# EAGLE board raspberry (EAGLE 9.6.2)
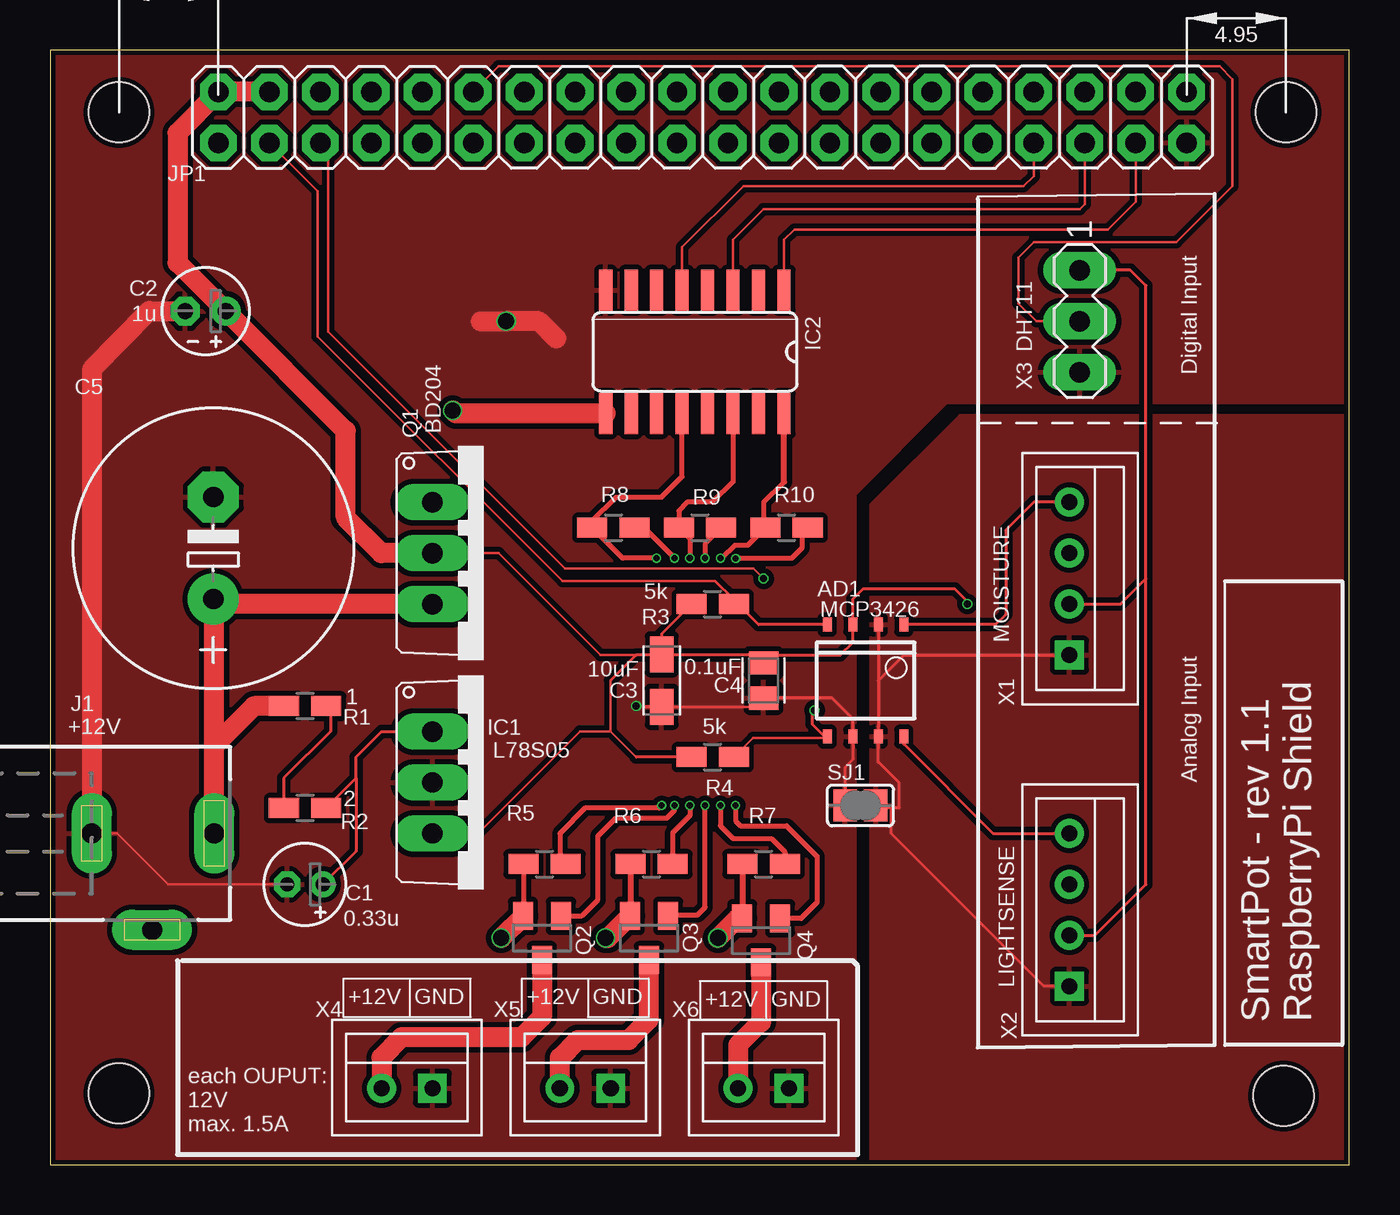
[diagram p0: board, top side]
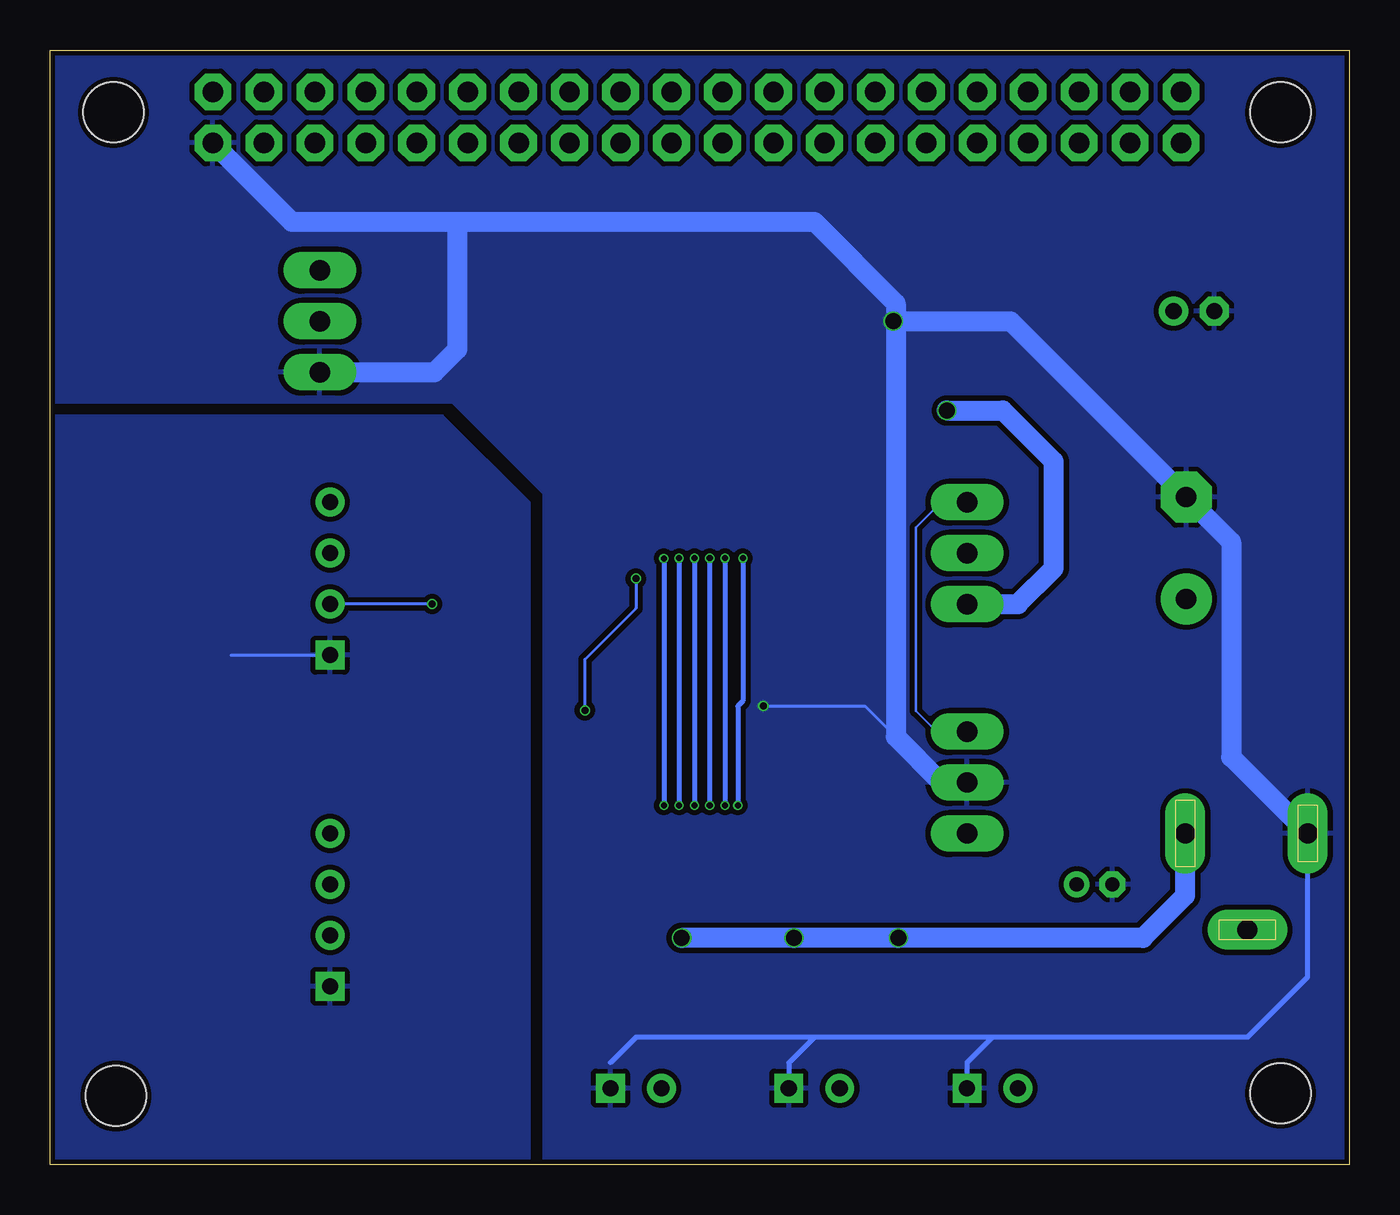
[diagram p1: board, bottom side, seen from below]

Size 64.75 x 55.55 mm. Coordinates in mm from the lower left corner, seen from the top.
Outline: 0,0 64.75,0 64.75,55.55 0,55.55 0,0
Copper layers (1*16): Top 0.035mm / dielectric 1.6mm / Bottom 0.035mm
Design rules "jlcpcb-2layers": minimum track width 5mil, minimum drill 0.3mm, track to track 5mil, track to pad 5mil, pad to pad 5mil, via to via 5mil, smd to smd 5mil, copper to edge 0.2mm, drill to drill 6mil, minimum pad ring 10mil, minimum via ring 3mil, stop-mask expansion 4mil, vias tented up to drill 0mil, thermal gap 10mil
Holes 3 mm at 3.43,52.45 61.59,52.45 61.47,3.43 3.43,3.56

## Footprints (pad centres in the part's own frame; a part is rotated, then mirrored left to right if it is on the bottom)
SO-8 = smd 0.7 x 0.45: 1 -2.79,1.905; 2 -2.79,0.635; 3 -2.79,-0.635; 4 -2.79,-1.905; 5 2.79,-1.905; 6 2.79,-0.635; 7 2.79,0.635; 8 2.79,1.905
E1,8-4 = drill 0.711 pad 1.168: + -0.889,0 | drill 0.711 pad 1.168 octagon: - 0.889,0
E2-4 = drill 0.813 pad 1.27: + -1.016,0 | drill 0.813 pad 1.27 octagon: - 1.016,0
CAPM3216X180 = smd 1.796 x 1.189: 1 -1.31,0; 2 1.31,0
CAPC2012X110 = smd 1.165 x 1.465: 1 -0.875,0; 2 0.875,0
E5-13 = drill 1.016 pad 2.54: + -2.54,0 | drill 1.016 pad 2.54 octagon: - 2.54,0
TO220V = drill 1.016 long: 1 -2.54,-2.54; 2 0,-2.54; 3 2.54,-2.54
SO16 = smd 0.66 x 2.032: 1 -4.445,-3.073; 2 -3.175,-3.073; 3 -1.905,-3.073; 4 -0.635,-3.073; 5 0.635,-3.073; 6 1.905,-3.073; 7 3.175,-3.073; 8 4.445,-3.073; 9 4.445,3.073; 10 3.175,3.073; 11 1.905,3.073; 12 0.635,3.073; 13 -0.635,3.073; 14 -1.905,3.073; 15 -3.175,3.073; 16 -4.445,3.073
DCJ0303 = drill 1 pad 2 long: 1 0,3.1; 2 4.8,0; 3 0,-3
2X20 = drill 1.016 octagon: 1 -24.13,-1.27; 2 -24.13,1.27; 3 -21.59,-1.27; 4 -21.59,1.27; 5 -19.05,-1.27; 6 -19.05,1.27; 7 -16.51,-1.27; 8 -16.51,1.27; 9 -13.97,-1.27; 10 -13.97,1.27; 11 -11.43,-1.27; 12 -11.43,1.27; 13 -8.89,-1.27; 14 -8.89,1.27; 15 -6.35,-1.27; 16 -6.35,1.27; 17 -3.81,-1.27; 18 -3.81,1.27; 19 -1.27,-1.27; 20 -1.27,1.27; 21 1.27,-1.27; 22 1.27,1.27; 23 3.81,-1.27; 24 3.81,1.27; 25 6.35,-1.27; 26 6.35,1.27; 27 8.89,-1.27; 28 8.89,1.27; 29 11.43,-1.27; 30 11.43,1.27; 31 13.97,-1.27; 32 13.97,1.27; 33 16.51,-1.27; 34 16.51,1.27; 35 19.05,-1.27; 36 19.05,1.27; 37 21.59,-1.27; 38 21.59,1.27; 39 24.13,-1.27; 40 24.13,1.27
SOT23 = smd 1 x 1.4: 1 -0.95,-1.1; 2 0.95,-1.1; 3 0,1.1
R0805W = smd 1.5 x 1: 1 -1.052,0; 2 1.052,0
SJ = smd 1.168 x 1.6: 1 -0.762,0; 2 0.762,0
B4B-XH = drill 0.8 square: P$1 3.81,0 | drill 0.8: P$2 1.27,0; P$3 -1.27,0; P$4 -3.81,0
MA03-1 = drill 1.016 long: 1 -2.54,0; 2 0,0; 3 2.54,0
B2B-XH = drill 0.8 square: P$1 2.54,0 | drill 0.8: P$2 0,0

## Placement (x,y rotation side)
AD1  MCP3426  [SO-8]  40.64,24.13 270 top
C1  0.33u  [E1,8-4]  12.7,13.97 180 top
C2  1u  [E2-4]  7.75,42.55 180 top
C3  10uF  [CAPM3216X180]  30.48,24.13 270 top
C4  0.1uF  [CAPC2012X110]  35.56,24.13 270 top
C5  1000uF  [E5-13]  8.13,30.73 90 top
IC1  L78S05  [TO220V]  21.59,19.05 270 top
IC2  ULN2003AD  [SO16]  32.13,40.51 180 top
J1  [DCJ0303]  5.08,16.51 270 top
JP1  [2X20]  32.51,52.2 0 top
Q1  BD204  [TO220V]  21.59,30.48 270 top
Q2  AO3401A  [SOT23]  24.51,11.3 180 top
Q3  AO3401A  [SOT23]  29.84,11.3 180 top
Q4  AO3401A  [SOT23]  35.43,11.18 180 top
R1  1  [R0805W]  12.7,22.86 180 top
R2  2  [R0805W]  12.7,17.78 180 top
R3  5k  [R0805W]  33.02,27.94 0 top
R4  5k  [R0805W]  33.02,20.32 0 top
R5  10k  [R0805W]  24.64,14.99 0 top
R6  10k  [R0805W]  29.97,14.99 0 top
R7  10k  [R0805W]  35.56,14.99 0 top
R8  50  [R0805W]  28.07,31.75 0 top
R9  50  [R0805W]  32.38,31.75 0 top
R10  50  [R0805W]  36.7,31.75 0 top
SJ1  [SJ]  40.39,17.91 0 top
X1  MOISTURE  [B4B-XH]  50.8,29.21 270 top
X2  LIGHTSENSE  [B4B-XH]  50.8,12.7 270 top
X3  DHT11  [MA03-1]  51.31,42.04 270 top
X4  02-JST  [B2B-XH]  16.51,3.81 0 top
X5  02-JST  [B2B-XH]  25.4,3.81 0 top
X6  02-JST  [B2B-XH]  34.29,3.81 0 top

## Library data of the parts
AD1 Q2-Q4 = Custom_Library
C1 C2 C5 = rcl; SPICEPREFIX: C
C3 C4 = Capacitor; CATEGORY: Capacitor
IC1 = linear
IC2 = uln-udn
J1 = con-jack; OC_FARNELL: unknown; OC_NEWARK: unknown
JP1 = pinhead
Q1 = transistor
R1-R10 = rcl; SPICEPREFIX: R
SJ1 = jumper
X1 X2 X4-X6 = bt_con-jst-xh
X3 = con-lstb; OC_FARNELL: unknown; OC_NEWARK: unknown

## Nets
+3V3: JP1.1
+5V: AD1.3 C2.+ C3.1 C4.1 IC1.3 JP1.2 JP1.4 Q1.2 R3.1 R4.1 X1.P$2 X2.P$2 X3.1
+12V: C5.+ IC2.9 J1.1 Q1.3 Q2.2 Q3.2 Q4.2 R1.2 R5.1 R6.1 R7.1
AGND: AD1.2 AD1.7 SJ1.2 X1.P$1 X2.P$1
GND: AD1.6 C1.- C2.- C3.2 C4.2 C5.- IC1.2 IC2.8 J1.3 JP1.39 SJ1.1 X3.3 X4.P$1 X5.P$1 X6.P$1
GPIO18-DHT11-DATA: JP1.12 X3.2
N$1: R1.1 R2.2
N$2: AD1.4 JP1.3 R3.2
N$3: C1.+ IC1.1 Q1.1 R2.1
N$4: AD1.5 JP1.5 R4.2
N$5: AD1.8 X2.P$4
N$6: AD1.1 X1.P$4
N$7: IC2.1 JP1.37
N$8: Q3.3 X5.P$2
N$9: Q4.3 X6.P$2
N$10: IC2.3 JP1.35
N$11: Q2.3 X4.P$2
N$12: IC2.16 R7.2 R10.1
N$13: Q2.1 R8.2
N$14: IC2.5 JP1.33
N$15: Q3.1 R9.2
N$16: IC2.12 R5.2 R8.1
N$17: IC2.14 R6.2 R9.1
N$18: Q4.1 R10.2

## Tracks (layer width: path | path; a pad name or v marks a point on that pad's centre or on a via)
+5V  (via drill 0.35)
  Top 0.127: 29.21,20.32 27.94,21.59 | 27.94,21.59 27.94,24.13 | IC1.3 21.34,16.51 26.42,21.59 27.94,21.59 | Q1.2 22.35,30.48 27.43,25.4 29.21,25.4
  Top 0.152: 30.44,25.4 29.21,25.4 27.94,24.13 | 30.44,25.4 C3.1 30.48,26.45 R3.1 | 30.44,25.4 35.16,25.4 C4.1 35.95,25.4 39.37,25.4 40,26.03 AD1.3 40,28.19 40.52,28.7 45.08,28.7 45.72,28.07 v45.72,27.94 | X3.1 53.85,44.58 54.61,43.81 54.61,29.21 | X1.P$2 53.34,27.94 54.61,29.21 | X2.P$2 52.07,11.43 54.61,13.97 54.61,29.21 | R4.1 29.21,20.32
  Top 1: JP1.4 JP1.2 6.35,51.44 6.35,44.96 C2.+ 14.73,36.58 14.73,32.26 16.51,30.48 Q1.2
  Bottom 0.152: v45.72,27.94 X1.P$2
+12V  (via drill 0.8)
  Top 0.254: R5.1 23.59,12.43 Q2.2
  Top 0.305: R7.1 34.51,12.3 Q4.2 | R6.1 28.92,12.43 Q3.2
  Top 1: v20.07,37.59 20.22,37.44 IC2.9 | J1.1 8.18,20.88 | 8.18,20.88 10.16,22.86 R1.2 | 8.18,28.14 C5.+ | 8.18,20.88 8.18,28.14 | Q1.3 8.38,27.94 8.18,28.14 | v33.27,11.3 34.25,12.28 Q4.2 | Q2.2 23.56,12.39 v22.48,11.3 | Q3.2 27.8,11.3 v27.69,11.3
  Bottom 1: Q1.3 16.51,27.94 14.73,29.72 14.73,35.05 17.27,37.59 v20.07,37.59 | v33.27,11.3 v27.69,11.3 v22.48,11.3 10.29,11.3 8.18,13.41 J1.1
AGND
  Top 0.127: 41.27,21.84 AD1.7
  Top 0.152: X2.P$1 49.53,8.89 41.91,16.51 41.91,17.78 | AD1.2 41.27,24.13 | 41.27,24.13 41.27,21.84 | AD1.7 41.27,20.07 42.29,19.05 42.29,17.78 41.91,17.78 | SJ1.2 41.27,17.78 41.91,17.78 | 41.27,24.13 42.54,25.4 X1.P$1
  Bottom 0.152: 55.74,25.4 X1.P$1
  pour Top (isolate 0.254): 64.77,37.34 45.34,37.34 40.89,32.89 40.89,0 64.77,0
  pour Bottom (isolate 0.254): 64.77,37.34 45.21,37.34 40.89,33.02 40.89,0 64.77,0
GND  (via drill 0.35, 0.8)
  Top 0.127: C3.2 35.56,22.82 | C1.- 5.89,13.97 3.35,16.51 J1.3
  Top 0.152: 35.56,22.82 C4.2 38.97,23.26 40,22.23 AD1.6 40,20.19 39.62,19.81 SJ1.1 | C3.2 29.25,22.82 v29.21,22.86
  Top 1: J1.3 2.08,39.62 4.95,42.55 C2.- | 21.46,42.04 v22.73,42.04 24.36,42.04 25.22,41.17
  Bottom 0.152: v29.21,22.86 24.13,22.86 20.32,19.05
  Bottom 0.254: 17.78,6.35 19.05,5.08 X4.P$1 | 26.67,6.35 27.94,5.08 X5.P$1 | J1.3 2.08,9.35 5.08,6.35 17.78,6.35 | 17.78,6.35 26.67,6.35 | 26.67,6.35 35.56,6.35 36.83,5.08
  Bottom 1: J1.3 5.89,20.32 5.89,31.04 C5.- 16.89,42.04 v22.73,42.04 | IC1.2 20.32,19.05 22.61,21.34 22.61,41.91 v22.73,42.04 | v22.73,42.04 22.61,42.16 22.61,42.93 26.67,46.99 44.45,46.99 | JP1.39 52.7,46.99 44.45,46.99 | X3.3 45.59,39.5 44.45,40.64 44.45,46.99
  pour Top (isolate 0.254): 40.13,0 40.13,33.4 44.7,37.97 64.77,37.97 64.77,55.88 0,55.88 0,0
  pour Bottom (isolate 0.254): 0,55.88 0,0 40.13,0 40.13,33.42 44.68,37.97 64.77,37.97 64.77,55.75 64.64,55.88
GPIO18-DHT11-DATA
  Top 0.127: X3.2 49.15,42.04 48.26,42.93 48.26,45.21 49.02,45.97 56.13,45.97 58.93,48.77 58.93,54.1 58.29,54.74 22.35,54.74 JP1.12
N$1
  Top 0.152: R1.1 13.97,22.64 13.97,21.59 11.65,19.27 R2.2
N$2
  Top 0.127: 33.15,29.08 25.53,29.08 13.34,41.28 13.34,48.51 JP1.3
  Top 0.152: AD1.4 35.31,26.92 34.29,27.94 R3.2 34.07,28.16 33.15,29.08
N$3
  Top 0.152: R2.1 15.24,19.27 | 15.24,19.27 15.24,20.32 16.51,21.59 IC1.1 | C1.+ 15.24,15.62 15.24,19.27
  Bottom 0.127: IC1.1 20.57,21.59 21.59,22.61 21.59,31.75 20.32,33.02 Q1.1
N$4  (via drill 0.35)
  Top 0.127: R4.2 35.03,21.27 38.67,21.27 | JP1.5 13.84,50.55 13.84,41.53 25.65,29.72 35.05,29.72 v35.56,29.21
  Top 0.152: AD1.5 38.67,21.27 37.97,21.98 37.97,22.52 v38.1,22.65
  Bottom 0.152: v35.56,29.21 35.56,27.73 38.1,25.19 v38.1,22.65
N$5
  Top 0.152: AD1.8 42.54,20.96 46.99,16.51 X2.P$4
N$6
  Top 0.152: X1.P$4 49.02,33.02 47.62,31.62 47.62,27.42 47.12,26.92 AD1.1
N$7
  Top 0.127: IC2.1 36.58,46.1 37.08,46.61 52.7,46.61 54.1,48.01 JP1.37
N$8
  Top 1: X5.P$2 25.4,5.33 26.29,6.22 28.83,6.22 29.84,7.24 Q3.3
N$9
  Top 1: Q4.3 35.43,7.11 34.29,5.97 X6.P$2
N$10
  Top 0.127: IC2.3 34.04,46.1 35.56,47.62 51.31,47.62 51.56,47.88 JP1.35
N$11
  Top 1: Q2.3 24.51,7.37 23.5,6.35 17.53,6.35 16.51,5.33 X4.P$2
N$12  (via drill 0.3)
  Top 0.254: 36.58,34.04 35.56,33.02 35.56,31.84 R10.1 34.76,30.86 34.13,30.86 33.49,30.23 v33.4,30.23 | v33.4,17.91 33.4,16.89 34.04,16.26 35.94,16.26 36.61,15.59 R7.2
  Top 0.305: 36.58,34.04 IC2.16
  Bottom 0.254: v33.4,30.23 v33.4,17.91
N$13  (via drill 0.3)
  Top 0.254: R8.2 29.25,31.88 29.46,31.88 v31.11,30.23 | Q2.1 26.5,12.4 27.3,13.21 27.3,16.38 28.19,17.27 30.73,17.27 31.11,17.65 v31.11,17.91
  Bottom 0.254: v31.11,30.23 v31.11,17.91
N$14
  Top 0.127: JP1.33 49.02,49.28 48.51,48.77 34.54,48.77 31.5,45.72 IC2.5
N$15  (via drill 0.3)
  Top 0.254: R9.2 32.64,30.95 v32.64,30.23 | Q3.1 30.84,12.45 32.26,12.45 32.64,12.83 v32.64,17.91
  Bottom 0.254: v32.64,30.23 v32.64,17.91
N$16  (via drill 0.3)
  Top 0.254: v30.23,30.23 28.54,30.23 R8.1 27.02,32.09 28.19,33.27 30.48,33.27 31.5,34.29 IC2.12 | v30.48,17.91 30.35,17.78 26.67,17.78 25.4,16.51 25.4,15.28 R5.2
  Bottom 0.254: v30.23,30.23 30.23,23.11 30.48,22.86 v30.48,17.91
N$17  (via drill 0.3)
  Top 0.254: IC2.14 34.04,34.04 33.02,33.02 31.75,33.02 31.33,32.6 R9.1 31.88,31.2 v31.88,30.23 | v31.88,17.91 31.88,17.4 31.02,16.55 R6.2
  Bottom 0.254: v31.88,30.23 v31.88,17.91
N$18  (via drill 0.3)
  Top 0.254: R10.2 37.46,31.46 37.46,30.73 36.95,30.22 v34.17,30.22 | v34.16,17.91 34.16,17.15 34.42,16.89 36.7,16.89 38.23,15.37 38.23,13.08 37.42,12.28 Q4.1
  Bottom 0.254: v34.17,30.22 v34.17,17.91 v34.16,17.91

## Text on the board
tNames: Digital Input | +12V | Analog Input | +12V GND | +12V GND | +12V GND | SmartPot - rev 1.1 / RaspberryPi Shield | each OUPUT: / 12V / max. 1.5A